# Altium PCB PCB1.PcbDoc (part 2 of 3)
Units mm, origin at the board's own origin, x right, y up, seen from the top; angles counter-clockwise.
Board outline 52.5 x 44.25 mm, 6 copper layers (Top Layer, Int1 (GND), Int2 (Sign), Int3 (Sign), Int4 (PWR), Bottom Layer), stack 1.551 mm thick; 69 components, 80 nets, 350 pads, 96 vias.
Unrouted connection lines stored in the file: 150.
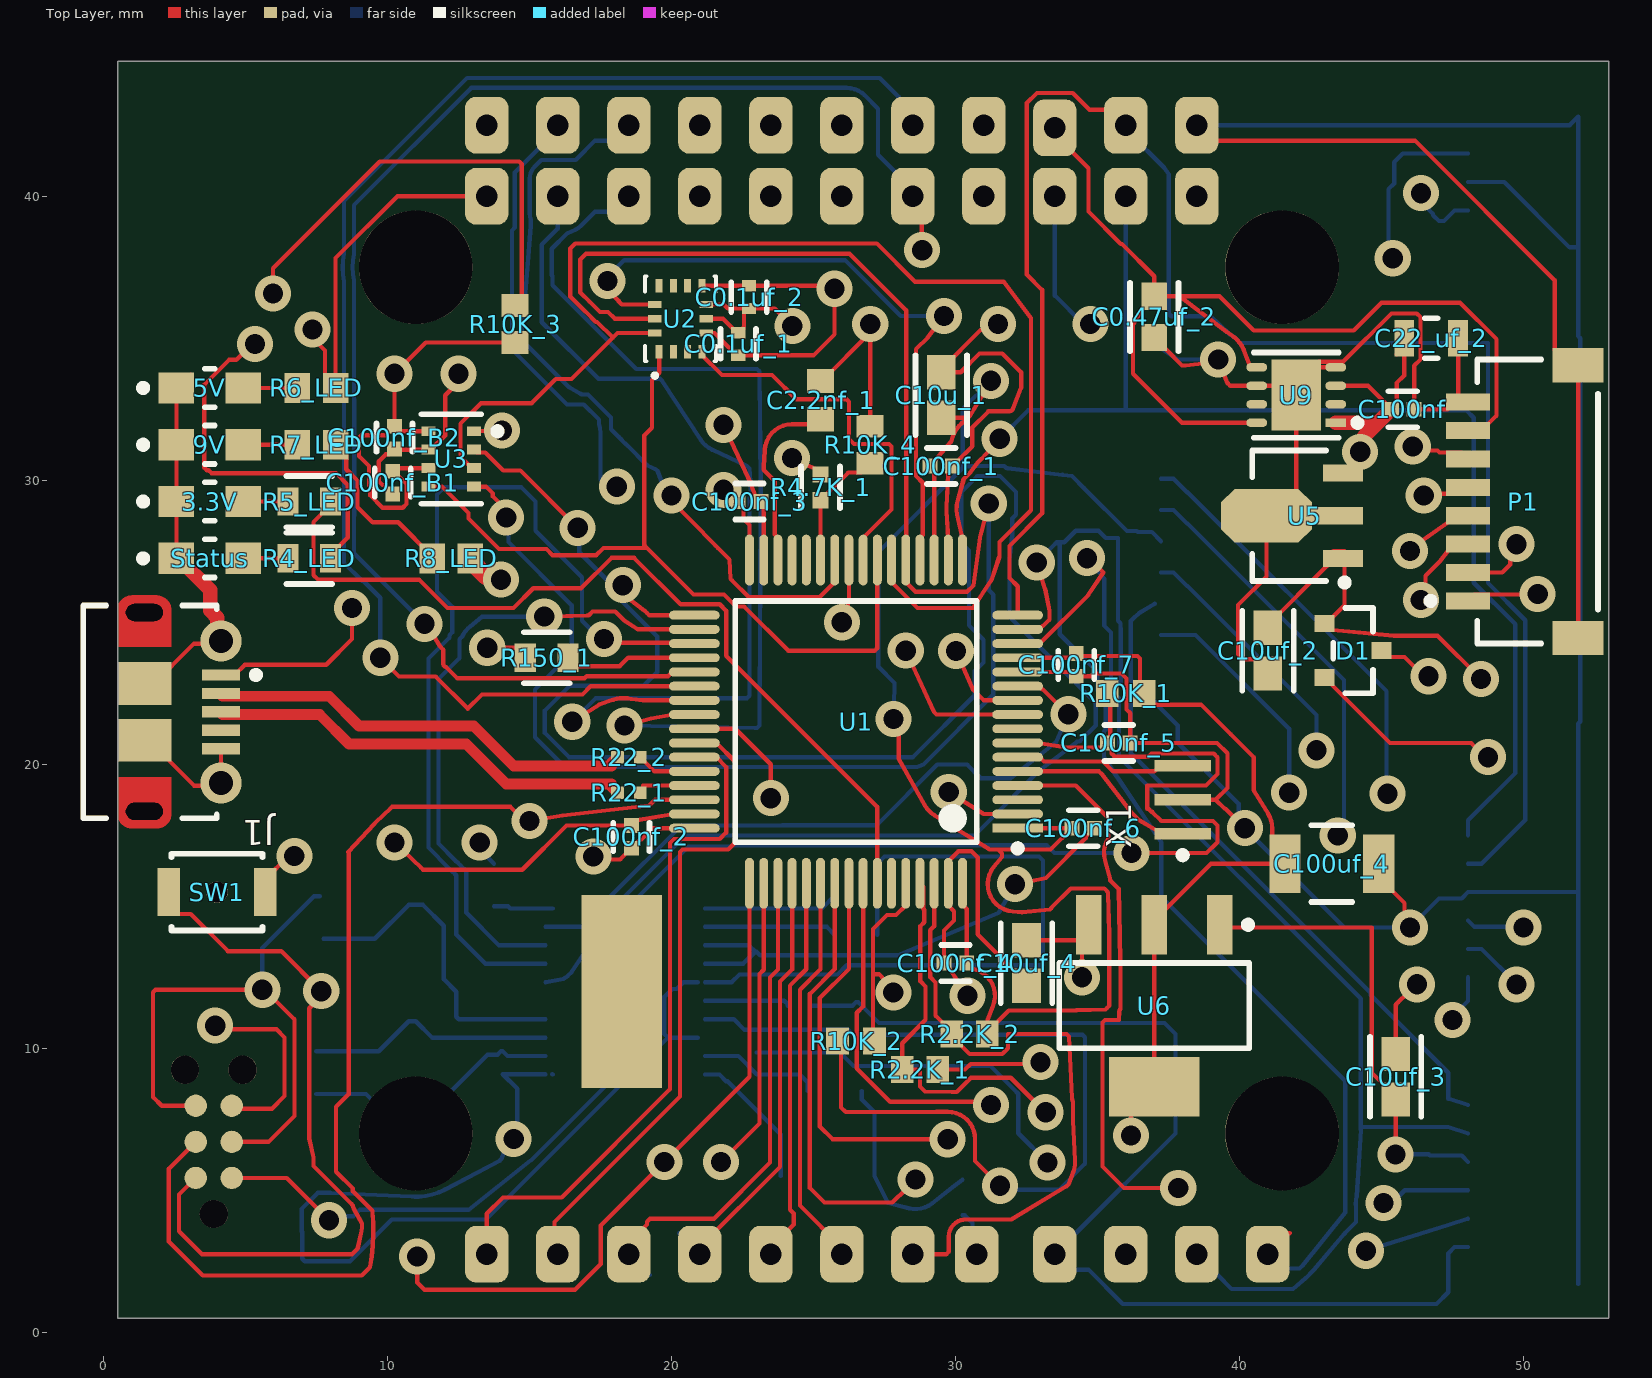
[diagram p0: Top Layer view]

## Via types
v1: diameter 1.27, hole 0.711, Top Layer to Bottom Layer, 96 vias

## Nets (pads, with @x,y where several pads share a name; then routed paths per layer and width w, separated by ;. In a path a pad name is that pad's centre, name@x,y a point inside that pad or via, vN(x,y) a via of type N, cw(c..) or ccw(c..) an arc to the next point about the centre after c; other vN are vias at no path point) (continued)
9V: (continued)
  Top Layer w0.508: U9.1@43.391,32.025 44.875,32.025 ; U5.3@43.65,30.25 44.05,30.25 44.096,30.296 44.096,30.64 44.25,30.794 v1(44.25,31) 44.396,31.146 44.396,31.546 44.875,32.025 ; C100nf.1@45.35,32.5 44.875,32.025
  Top Layer w0.635: R8_LED.2@12.925,27.25 12.925,27.175 v1@13.479,26.622
  Int3 (Sign) w0.15: v1(14,26.5) 14.25,26.5 14.836,27.086 15.018,27.268 19.232,27.268 21.642,24.858 25.818,24.053 ccw(c26,25) 26.445,24.145 26.447,24.146 27.804,24.854 cw(c28.25,24) 27.932,24.91 cw(c28.25,24) 28.271,24.964 29.583,24.935 cw(c29.75,23.985) 29.765,24.949 30.029,24.947 cw(c30.02,23.983) 30.035,24.947 39.669,24.793 39.733,24.793 39.777,24.837 39.865,24.925 44.25,30.212 44.25,30.336 ; v1(44.25,31) 44.25,30.336 ; v1(50,14.25) 50.027,14.271 51.75,15.994 51.75,23.421 51.466,23.421 46.415,28.471 46.177,28.471 45.878,28.715 cw(c46.487,29.462) 45.804,28.782 44.25,30.336
  Bottom Layer w0.15: P3.4@48.05,14.5 48.275,14.275 49.975,14.275 v1(50,14.25)
27MHZ: C18pf_1.1 U8.5 Y2.1 | length 8.8
  Bottom Layer w0.15: C18pf_1.1@7.493,9.894 9.694,9.894 10.75,10.95 Y2.1@11,10.95 11.575,10.375 U8.5@15.57,10.375
27MHZ_XFB: CC18pf_2.1 U8.6 Y2.2 | length 11.6
  Bottom Layer w0.15: CC18pf_2.1@7.747,13.855 9.555,13.855 10.75,15.05 Y2.2@11,15.05 11.25,15.05 11.984,14.316 11.984,12.435 12.425,11.993 12.425,11.113 12.513,11.025 U8.6@15.57,11.025
ADC_CURR: P1.2 pad.51 U1.9 | length 76.7
  Top Layer w0.15: v1(28.25,24) 29.245,21.837 29.332,21.75 29.381,21.75 U1.9@32.191,21.75 ; P1.2@48.05,26.75 49.25,26.75 49.536,27.036 49.536,27.536 v1(49.75,27.75)
  Int2 (Sign) w0.15: pad.51@31,40 30.619,39.381 30.557,35.769 cw(c29.593,35.786) 30.547,35.642 ccw(c31.5,35.5) 30.542,35.608 30.493,35.171 28.25,32.928 v1(28.25,24) 28.267,23.983 28.378,23.065 28.782,22.002 28.791,21.977 28.791,21.947 28.75,20.391 ccw(c28.9,20.387) 28.75,20.387 28.75,17.588 28.838,17.5 30.25,17.5 32.352,19.602 32.352,21.348 33.215,22.437 cw(c33.971,21.838) 33.294,22.524 42.773,31.877 44.282,33.386 44.282,38.945 45.555,38.945 45.568,38.932 49.578,38.932 49.635,38.928 49.674,38.888 49.75,38.812 v1(49.75,27.75)
ADC_VBAT: pad.53 U1.10 | length 23.2
  Top Layer w0.15: v1(30.02,23.983) 30.602,22.662 30.634,22.616 31,22.25 U1.10@32.191,22.25
  Int2 (Sign) w0.15: v1(30.02,23.983) 30.02,27.27 30.875,28.125 33.125,28.125 34.75,29.75 v1(34.75,35.5)
  Bottom Layer w0.15: pad.53@33.5,40 33.5,36.5 34.5,35.5 v1(34.75,35.5)
BEEPER_PIN: P5.3 pad.17 U1.2 | length 71.4
  Top Layer w0.15: v1(29.764,19.024) 31,18.25 31.062,18.25 U1.2@32.191,18.25
  Int2 (Sign) w0.15: pad.17@13.5,42.5 13.5,41.313 13.588,41.225 15.368,41.225 15.418,41.275 21.632,41.275 22.25,41.893 22.25,43.107 22.868,43.725 24.132,43.725 24.775,43.082 24.775,41.868 25.418,41.225 31.632,41.225 32.25,40.607 32.25,39.393 32.868,38.775 39.132,38.775 40.082,39.725 43.5,39.725 43.725,39.5 ; v1(29.764,19.024) 30.184,19.915 30.21,19.967 cw(c34.16,16.747) 30.568,20.361 cw(c34.16,16.747) 30.569,20.363 41.478,31.272 43.75,33.543 43.75,37.25 43.725,37.275 43.725,39.5 ; v1(46.391,40.108) 44.171,40.108 43.725,39.662 43.725,39.5
  Bottom Layer w0.15: v1(46.391,40.108) 46.391,39.805 46.817,39.378 46.817,39.332 47.026,39.124 47.199,39.124 47.575,39.5 P5.3@48.05,39.5
CAMERA_CONTROL: C10uf_3.1 P2.5 R150_1.1 | length 56.9
  Top Layer w0.15: v1(13.517,24.102) 14.559,24.102 R150_1.1@14.859,23.75 ; C10uf_3.1@45.5,9.802 45.5,11.472 45.5,11.534 45.588,11.622 v1(46.248,12.252)
  Int3 (Sign) w0.15: v1(13.517,24.102) 13.666,23.118 13.718,23.065 13.806,22.977 15.805,20.837 ccw(c16.508,21.496) 15.834,20.807 21.762,15.021 21.85,14.933 32.241,14.786 ccw(c32.25,15.75) 32.259,14.786 43.486,14.89 43.61,14.89 46.462,12.038 46.462,6.211 46.462,6.202 46.316,3.816 46.275,3.775 45.956,3.456 45.912,3.412 45.371,2.871 v1(44.453,2.871)
  Bottom Layer w0.15: v1(44.453,2.871) 47.35,3.775 P2.5@48.05,4
Camera_Control_Pin: R150_1.2 U1.36 | length 4.8
  Top Layer w0.15: R150_1.2@16.275,23.834 R150_1.2@16.359,23.75 16.659,23.45 18.177,23.45 18.477,23.75 U1.36@20.809,23.75
CLKOUT: U8.7